# Altium PCB pcb2.PcbDoc
Units mil, origin at the board's own origin, x right, y up, seen from the top; angles counter-clockwise.
Board outline 4345 x 3590 mil, 2 copper layers (Top Layer, Bottom Layer); 19 components, 26 nets, 108 pads, 0 vias.
Unrouted connection lines stored in the file: 3.
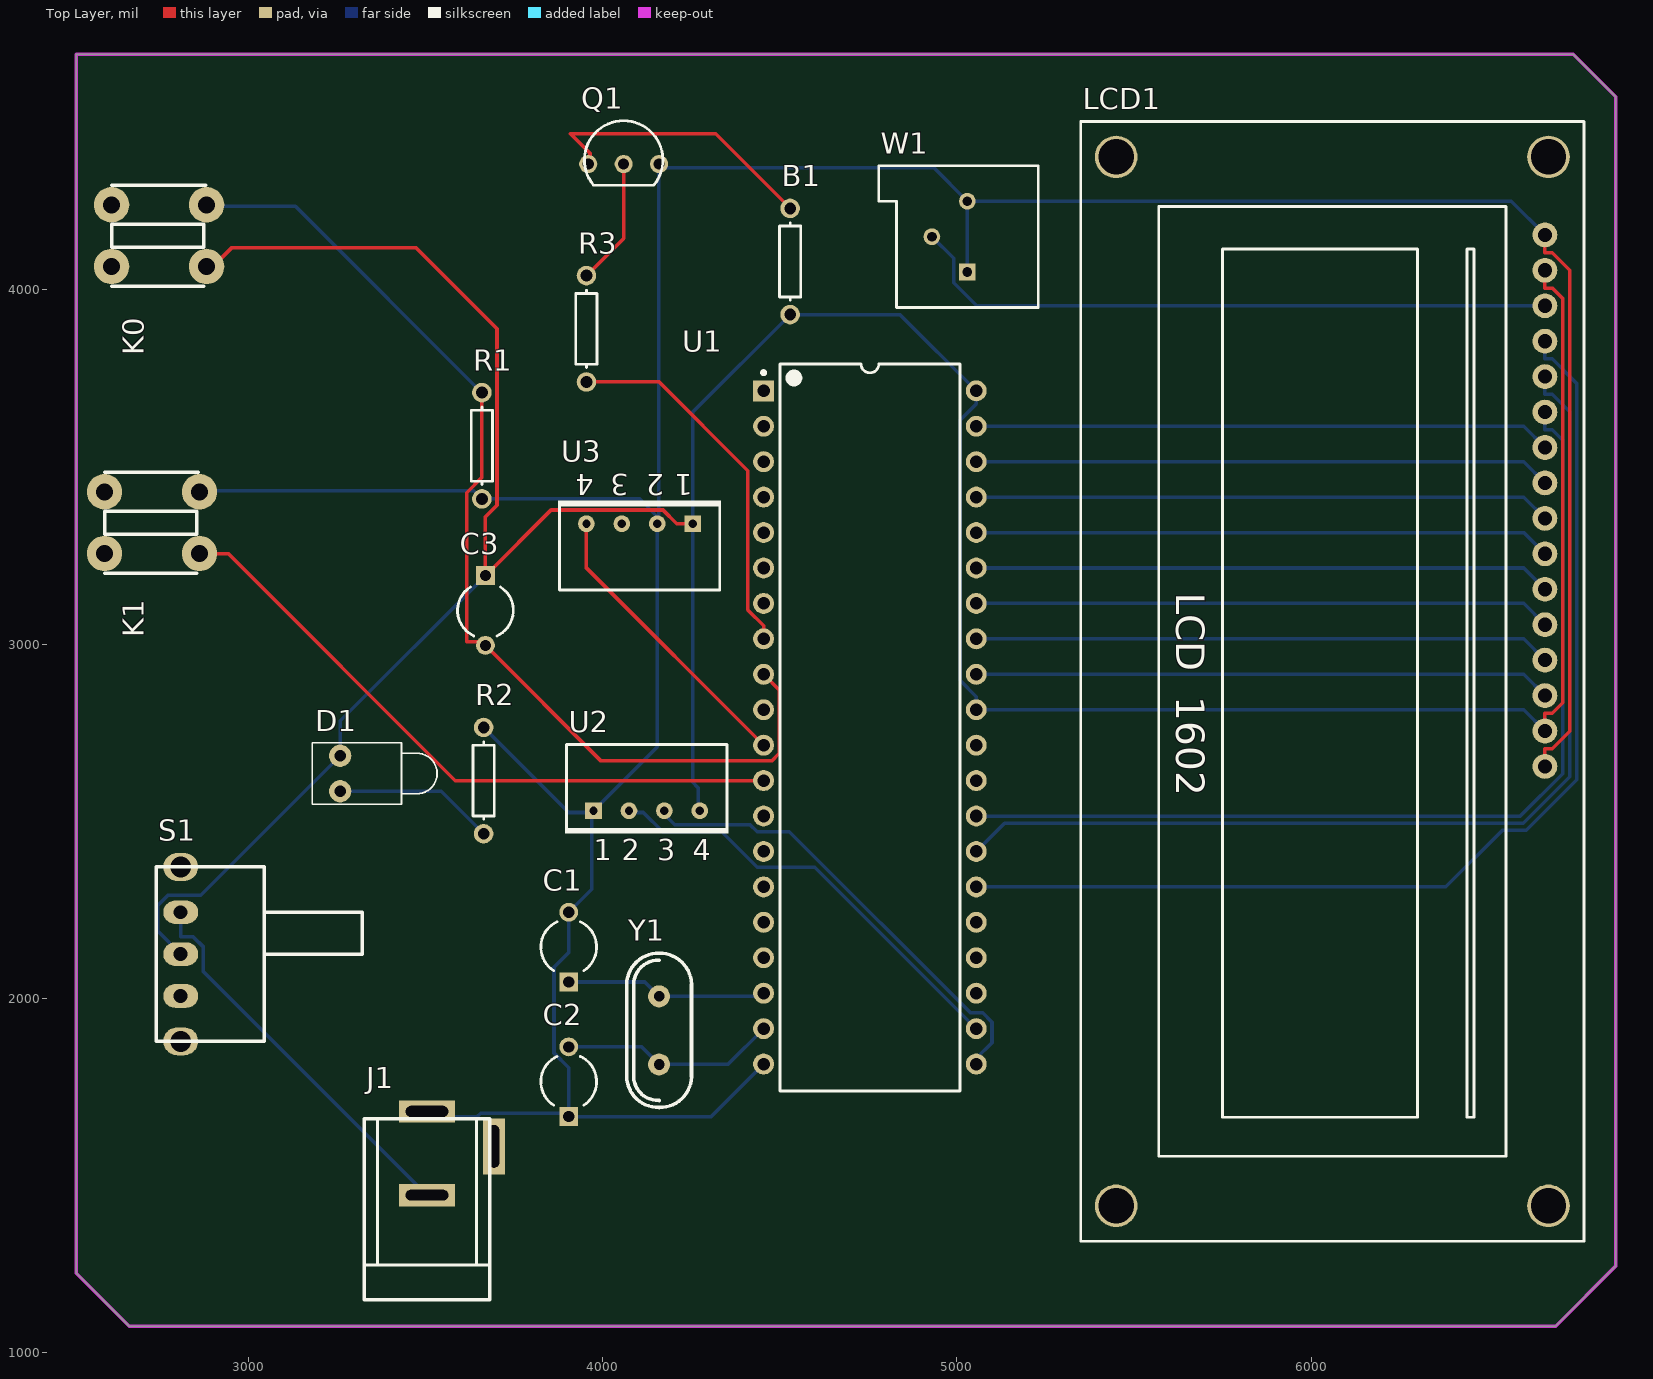
[diagram p0: Top Layer view]
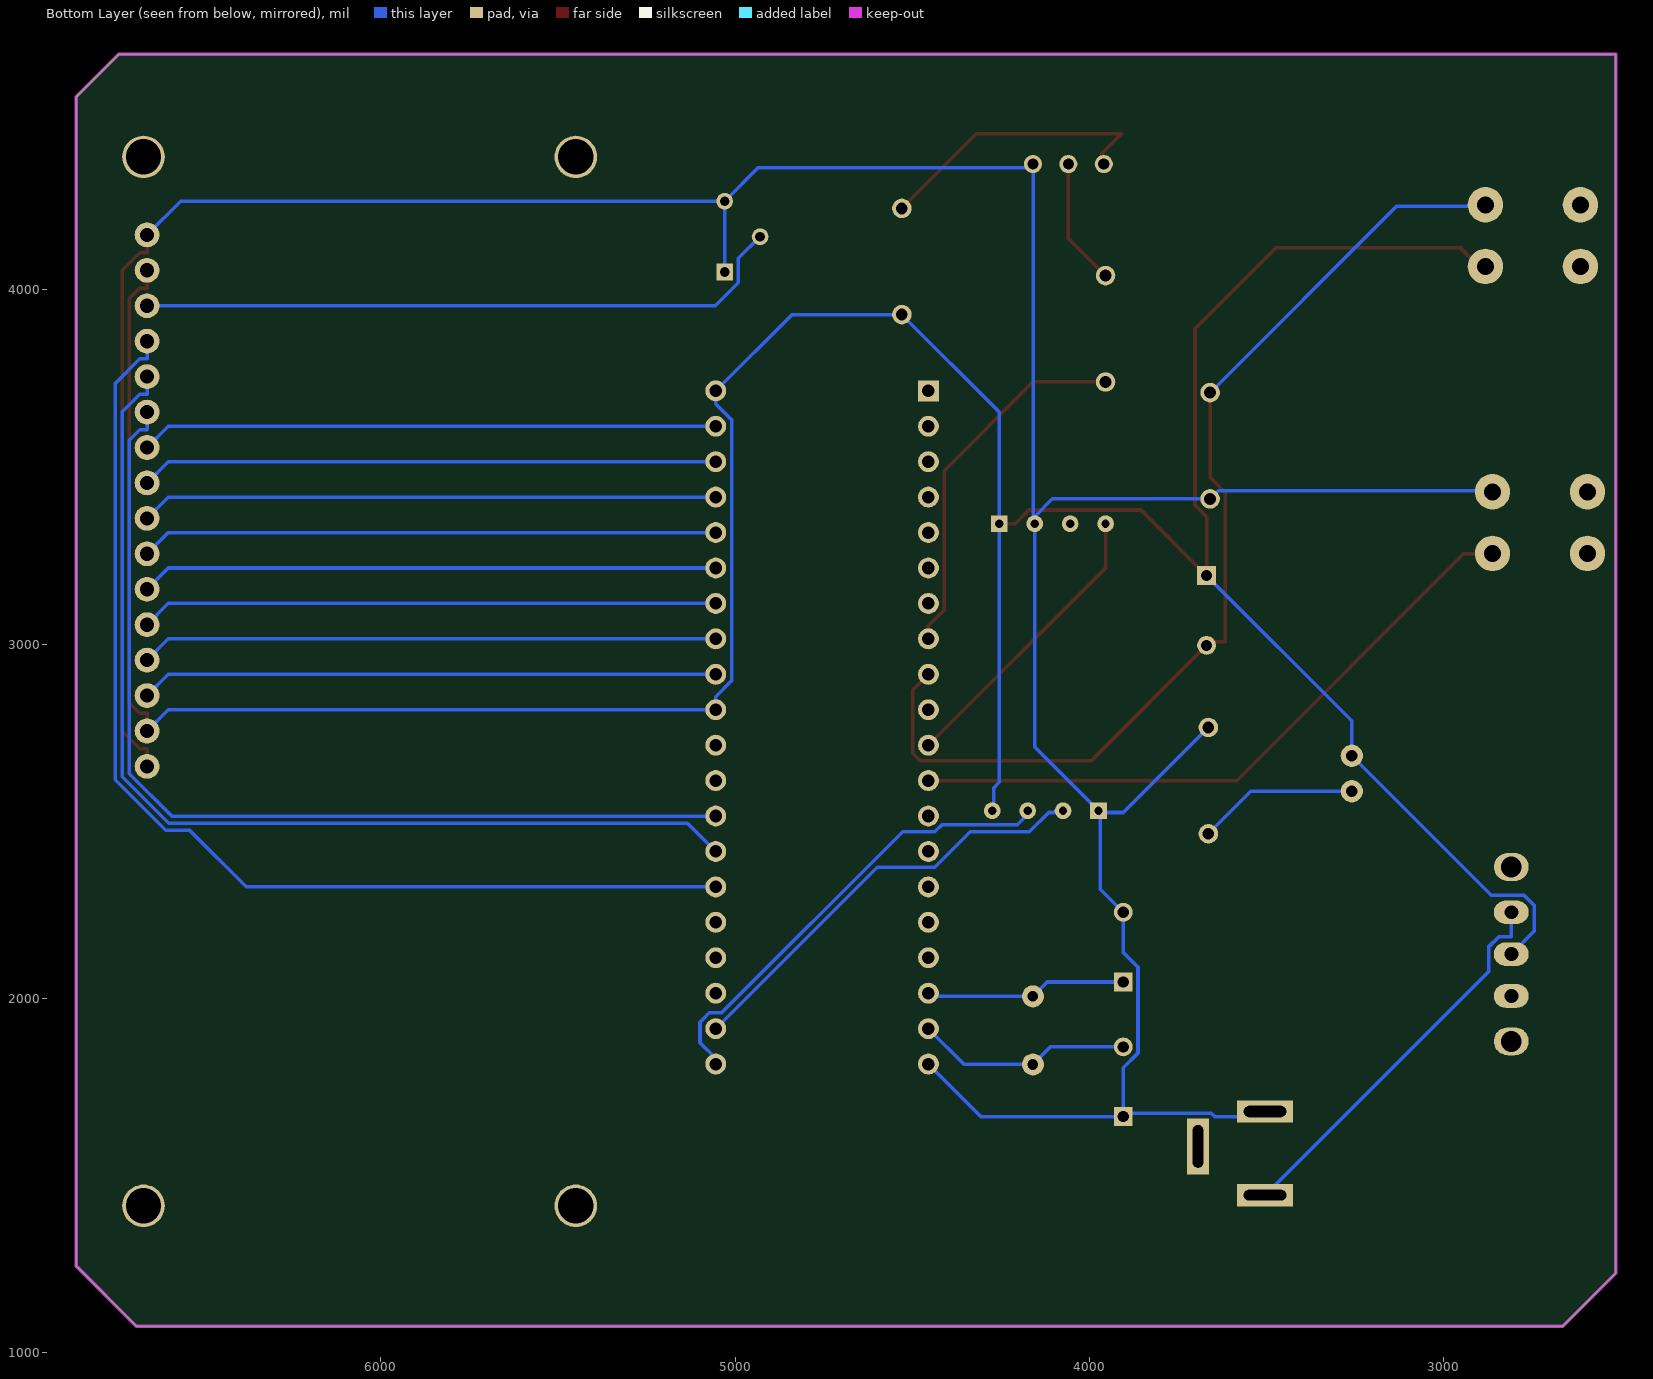
[diagram p1: Bottom Layer view, seen from below]

## Layer stack, top to bottom
Top Layer: signal copper 1.4
Dielectric: dielectric 12.6, FR-4, Dk 4.8
Bottom Layer: signal copper 1.4

## Board outline
2515,1225 2665,1075 6690,1075 6860,1245 6860,4545 6740,4665 2515,4665
cut-out: 2375,3275

## Design rules (kind name [scope] priority, off if disabled: settings)
Clearance [All] p1: gap=10
PolygonConnect [All] p1: connectstyle=Relief reliefconductorwidth=10 reliefentries=4 polygonreliefangle="90 Angle"
RoutingVias [All] p1: holewidth=28 width=50 viastyle="Through Hole" minholewidth=28 minwidth=50 maxholewidth=28 maxwidth=50
SilkscreenOverComponentPads SilkToSolderMaskClearance [IsPad] p1: minsilkscreentomaskgap=10
SolderMaskExpansion [All] p1: expansion=4
TestPointUsage FabricationTestPointUsage [All] p1: valid=0 allowmultiple=FALSE
Testpoint FabricationTestpoint [All] p1: side=3 testpointundercomponent=TRUE minsize=40 maxsize=100 preferedsize=60 minholesize=0 maxholesize=40 preferedholesize=32 testpointgrid=1 style=297 order=0123456789
Width [All] p1: maxlimit=10 minlimit=10 preferedwidth=10
23 further rules are at their usual default settings.

## Components (designator, comment, footprint, x,y, rotation, side; value= is the part's Value field where it differs from the comment)
B1 "" AXIAL-0.3 4530,4080 r270 top
C1 "22PF" CAPR5-4X5 3905,2145 r90 top
C2 "22PF" CAPR5-4X5 3905,1765 r90 top
C3 "10uF" CAPR5-4X5 3670,3095 r270 top
D1 "LED" LED-1 3260,2635 r0 top
J1 "CON2" DCIN 3505,1681.22 r270 top
K0 "SW DIP-2" PCBComponent_1 2615,4240 r0 top (schematic designator S3)
K1 "SW DIP-2" PCBComponent_1 2595,3430 r0 top (schematic designator S3)
LCD1 "LCD1602" "LCD 1602" 6060,2895 r270 top
Q1 "PNP" TO-92C-S 4060,4355 r0 top
R1 "10k" AXIAL-0.3 3660,3560 r270 top
R2 "1K" AXIAL-0.3 3665,2615 r90 top
R3 "1k" AXIAL-0.3 3955,3890 r90 top
S1 "SW-SPST" "SW-1 X 2" 2810,2125.32 r0 top
U1 "CPU" DIP-40 4755,2765 r0 top
U2 "HX711AD" SIP-P4/A6 4125,2530 r0 top
U3 "BT" SIP-P4/A6 4105,3340 r180 top
W1 "10K" VR4 4980,4150 r90 top
Y1 "CRYSTAL" XTAL2 4160,1910 r270 top

## Footprints (in the part's own frame and the unit in brackets; to place one, negate y for a bottom-side part, rotate by r counter-clockwise, add the part's x,y. Pads: shape width x height; smd on the part's side, far side on the other; paste and mask are expansions set on the pad)
AXIAL-0.3 [mm] "Axial Device, Thru-Hole; 2 Leads; 0.3 in Pin Spacing"
  round 1.4 hole 0.85: 1(-3.81,0) 2(3.81,0)
  silkscreen extent -2.77,-0.76 2.77,0.76
CAPR5-4X5 [mm] "Capacitor; 2 Leads"
  rect 1.35x1.35 hole 0.8: 1(-2.5,0)
  round 1.35 hole 0.8: 2(2.5,0)
  silkscreen extent -1.69,-2 1.82,2
DCIN [mm]
  rect 1.6x4 hole 0.8 slot 3.048 at 90 deg: 1(0,0)
  rect 1.6x4 hole 0.762 slot 3.048 at 90 deg: 2(6,0)
  rect 4x1.6 hole 0.762 slot 3.048 at 0 deg: 3(2.5,4.8)
  silkscreen extent 0.52,-4.5 13.5,4.5, body extent -0.2,-4.5 13.62,5, height 11.2
DIP-40 [mm] "DIP, 40-Pin, Row Spacing 15.24 mm, Pitch 2.54 mm"
  rect 1.5x1.5 hole 0.9: 1(-7.62,24.13)
  round 1.5 hole 0.9: 2(-7.62,21.59) 3(-7.62,19.05) 4(-7.62,16.51) 5(-7.62,13.97) 6(-7.62,11.43) 7(-7.62,8.89) 8(-7.62,6.35) 9(-7.62,3.81) 10(-7.62,1.27) 11(-7.62,-1.27) 12(-7.62,-3.81) 13(-7.62,-6.35) 14(-7.62,-8.89) 15(-7.62,-11.43) 16(-7.62,-13.97) 17(-7.62,-16.51) 18(-7.62,-19.05) 19(-7.62,-21.59) 20(-7.62,-24.13) 21(7.62,-24.13) 22(7.62,-21.59) 23(7.62,-19.05) 24(7.62,-16.51) 25(7.62,-13.97) 26(7.62,-11.43) 27(7.62,-8.89) 28(7.62,-6.35) 29(7.62,-3.81) 30(7.62,-1.27) 31(7.62,1.27) 32(7.62,3.81) 33(7.62,6.35) 34(7.62,8.89) 35(7.62,11.43) 36(7.62,13.97) 37(7.62,16.51) 38(7.62,19.05) 39(7.62,21.59) 40(7.62,24.13)
  silkscreen extent -7.74,-26.05 6.45,26.05, body extent -7.42,-26.03 7.42,26.03, height 5.08
"LCD 1602" [mil]
  round 120 hole 100: 0(-1480,-610) 0(-1480,610) 0(1480,-610) 0(1480,610)
  round 70 hole 40: 1(-1260,600) 2(-1160,600) 3(-1060,600) 4(-960,600) 5(-860,600) 6(-760,600) 7(-660,600) 8(-560,600) 9(-460,600) 10(-360,600) 11(-260,600) 12(-160,600) 13(-60,600) 14(40,600) 15(140,600) 16(240,600)
  silkscreen extent -1580,-710 1580,710
LED-1 [mm] "LED; 2 Leads"
  round 1.6 hole 0.8: 1(0,1.27) 2(0,-1.27)
  silkscreen extent -2,-2.2 6.95,2.2
PCBComponent_1 [mil]
  round 100 hole 48: 1(0,0) 2(0,-174) 3(268,-174) 4(268,0)
  silkscreen extent 0,-230 265,55
SIP-P4/A6 [mm] "SIP; 4 Leads; Body 10 x 11.5 x 6 mm (typ); Pitch 2.54 mm"
  rect 1.2x1.2 hole 0.6: 1(-3.81,0)
  round 1.2 hole 0.6: 2(-1.27,0) 3(1.27,0) 4(3.81,0)
  silkscreen extent -5.85,-1.65 5.86,4.75
"SW-1 X 2" [mm]
  oval 2.5x1.7 hole 1: 1(0,3) 2(0,0) 3(0,-3)
  oval 2.5x2 hole 1.5: 5(0,-6.25) 6(0,6.25)
  silkscreen extent -1.75,-6.25 13,6.25, body extent -0.61,-6.52 12.29,6.48, height 5.75
TO-92C-S [mm]
  round 1.3 hole 0.8: 1(2.54,0) 2(0,0) 3(-2.54,0)
  silkscreen extent -2.81,-1.52 2.81,3.1, body extent -2.89,-1.53 2.85,2.66, height 10.33
VR4 [mm] "Thru-Hole; 3 Leads"
  rect 1.2x1.2 hole 0.7: 1(-2.54,-1.27)
  round 1.2 hole 0.7: 2(0,1.27) 3(2.54,-1.27)
  silkscreen extent -5.08,-6.35 5.08,5.08
XTAL2 [mil]
  round 62 hole 30: 1(96.06,0) 2(-96.06,0)
  silkscreen extent -218,-92 218,92, body extent -223,-92 223,92, height 142

## Part data
B1: library part BELL, "Bell"
C1 C2: library part CAP, "Capacitor"
C3: library part "Cap Pol1", "Polarized Capacitor (Radial)"
J1: "Connector"
K0 K1: "DIP Switch"
Q1: "PNP Transistor"
R1 R2 R3: library part RES2
U1: library part 8031
U3: library part HC-06
W1: library part POT2, "Potentiometer"
Y1: "Crystal"

## Nets (pads, with @x,y where several pads share a name; then routed paths per layer and width w, separated by ;. In a path a pad name is that pad's centre, name@x,y a point inside that pad or via, vN(x,y) a via of type N, cw(c..) or ccw(c..) an arc to the next point about the centre after c; other vN are vias at no path point)
GND: C1.2 C2.1 J1.1 LCD1.1 LCD1.16 Q1.3 R1.2 R2.2 U1.20 U3.2 W1.1 W1.3 | length 10178.3
  Top Layer w10: LCD1.16 6660,2705 6680.71,2705 6730,2754.29 6730,4055.71 6680.71,4105 6660,4105 LCD1.1
  Bottom Layer w10: 2885,3433.11 3636.89,3433.11 R1.2 4105,3410 U3.2@4155,3360 ; J1.1 3519.65,1666.57 3646.31,1666.57 3656.27,1676.53 ; R2.2 3905,2525 3970,2525 ; 4159.41,4361.81 4159.41,3352.6 4167.6,3352.6 U3.2 4155,2710 3970,2525 ; 4164.41,4345 4935,4345 W1.3 ; U1.20 4306.57,1666.57 C2.1 C2.1@3905,1676.53 ; W1.1 W1.3 ; LCD1.1 6565,4250 W1.3 ; 3656.27,1676.53 C2.1@3905,1676.53 ; 3656.27,1676.53 C2.1@3905,1676.53 ; C2.1@3905,1676.53 3905,1804.63 3863.43,1846.21 3863.43,2088.15 3905,2129.72 C1.2 3970,2308.43 3970,2525
NetB1_1: B1.1 Q1.2 | length 814.8
  Top Layer w10: 3965,4355 3965,4385 3910,4440 4320,4440 B1.1
NetC1_1: C1.1 U1.18 Y1.2 | length 570.5
  Bottom Layer w10: C1.1 4119.49,2046.57 Y1.2 4446.06,2006.06 U1.18
NetC2_2: C2.2 U1.19 Y1.1 | length 612.4
  Bottom Layer w10: C2.2 4110.51,1863.43 Y1.1 4353.94,1813.94 U1.19
NetC3_2: C3.2 R1.1 U1.9 | length 2975.7
  Top Layer w10: R1.1 3660,3470.19 3617.44,3427.63 3617.44,3006.57 3660,3006.57 C3.2 3996.1,2670.47 4477.97,2670.47 4499.53,2692.03 4499.53,2870.47 U1.9
  Bottom Layer w10: 2895,4236.22 3133.78,4236.22 R1.1
NetD1_2: D1.2 R2.1 | length 454.7
  Bottom Layer w10: D1.2 3545,2585 R2.1
NetJ1_2: J1.2 S1.1 | length 1107.3
  Bottom Layer w10: S1.1 2810,2173.78 2845.82,2173.78 2874.21,2145.39 2874.21,2075.79 J1.2
NetK1_2: U1.12 | length 1830.1
  Top Layer w10: 2890,3255 2945,3255 3585,2615 U1.12
NetLCD1_3: LCD1.3 W1.2 | length 1850.9
  Bottom Layer w10: W1.2 4991.38,4088.62 4991.38,4020.16 5056.54,3955 LCD1.3
NetLCD1_4: LCD1.4 U1.26 | length 3107.1
  Bottom Layer w10: U1.26 6380,2315 6540,2475 6607.28,2475 6750,2617.72 6750,3735.71 6680.71,3805 6660,3805 LCD1.4
NetLCD1_5: LCD1.5 U1.27 | length 2932.5
  Bottom Layer w10: U1.27 5135,2495 6598.99,2495 6730,2626.01 6730,3655.71 6680.71,3705 6660,3705 LCD1.5
NetLCD1_6: LCD1.6 U1.28 | length 2758
  Bottom Layer w10: U1.28 6590.71,2515 6710,2634.29 6710,3575.71 6680.71,3605 6660,3605 LCD1.6
NetLCD1_7: LCD1.7 U1.39 | length 1629.9
  Bottom Layer w10: U1.39 6600,3615 LCD1.7
NetLCD1_8: LCD1.8 U1.38 | length 1629.9
  Bottom Layer w10: U1.38 6600,3515 LCD1.8
NetLCD1_9: LCD1.9 U1.37 | length 1629.9
  Bottom Layer w10: U1.37 6600,3415 LCD1.9
NetLCD1_10: LCD1.10 U1.36 | length 1629.9
  Bottom Layer w10: U1.36 6600,3315 LCD1.10
NetLCD1_11: LCD1.11 U1.35 | length 1629.9
  Bottom Layer w10: U1.35 6600,3215 LCD1.11
NetLCD1_12: LCD1.12 U1.34 | length 1629.9
  Bottom Layer w10: U1.34 6600,3115 LCD1.12
NetLCD1_13: LCD1.13 U1.33 | length 1629.9
  Bottom Layer w10: U1.33 6600,3015 LCD1.13
NetLCD1_14: LCD1.14 U1.32 | length 1629.9
  Bottom Layer w10: U1.32 6600,2915 LCD1.14
NetQ1_1: Q1.1 R3.2 | length 358.5
  Top Layer w10: R3.2 4060,4145 4060,4355
NetR3_1: R3.1 U1.8 | length 1052.2
  Top Layer w10: R3.1 4160,3740 4410.47,3489.53 4410.47,3096.56 4455,3052.03 U1.8
NetU1_11: U1.11 U3.4 | length 832.1
  Top Layer w10: U3.4 3955,3215 U1.11
NetU1_21: U1.21 | length 1311.4
  Bottom Layer w10: 4170,2525 4204.53,2490.47 4416.56,2490.47 4436.56,2470.47 4527.81,2470.47 5038.76,1959.53 5073.44,1959.53 5099.53,1933.44 5099.53,1875.47 5055,1830.94 U1.21
NetU1_22: U1.22 | length 1237.7
  Bottom Layer w10: 4070,2525 4115.38,2525 4169.91,2470.47 4336.56,2470.47 4436.56,2370.47 4599.53,2370.47 U1.22
VCC: B1.2 C3.1 D1.1 LCD1.2 LCD1.15 S1.2 U1.31 U1.40 U3.1 | length 9917.3
  Top Layer w10: 2895,4060 2953.11,4118.11 3474.45,4118.11 3702.56,3890 3702.56,3392.37 3670,3359.81 C3.1 3855.2,3378.62 4171,3378.62 4209.62,3340 U3.1 ; LCD1.15 6660,2805 6680.71,2805 6710,2834.29 6710,3975.71 6680.71,4005 6660,4005 LCD1.2
  Bottom Layer w10: S1.2 2745.79,2189.53 2745.79,2263.5 2774.18,2291.89 2866.89,2291.89 D1.1 3260,2783.43 C3.1 ; 4270,2525 4270,2595 4255,2610 U3.1 4255,3655 B1.2 4840,3930 U1.40 5055,3677.97 5010.47,3633.44 5010.47,2896.56 5055,2852.03 U1.31 6600,2815 LCD1.15
pads on no net: J1.3 K0.1 K0.2 K0.3 K0.4 K1.1 K1.2 K1.3 K1.4 LCD1.0 S1.3 S1.5 S1.6 U1.1 U1.2 U1.3 U1.4 U1.5 U1.6 U1.7 U1.10 U1.13 U1.14 U1.15 U1.16 U1.17 U1.23 U1.24 U1.25 U1.29 U1.30 U2.1 U2.2 U2.3 U2.4 U3.3

## Keep-outs
Keep-Out Layer:
  the board outline again, w10

## Text inside footprints (layer, text, board x,y; h text height)
LCD1: Top Overlay "LCD  1602" at 5620,3145 h80 r270
U2: Top Overlay "4" at 4255,2390.47 h59.06; Top Overlay "3" at 4155,2390.47 h59.06; Top Overlay "2" at 4055,2390.47 h59.06; Top Overlay "1" at 3975,2390.47 h59.06
U3: Top Overlay "1" at 4255,3479.53 h59.06 r180; Top Overlay "2" at 4175,3479.53 h59.06 r180; Top Overlay "3" at 4075,3479.53 h59.06 r180; Top Overlay "4" at 3975,3479.53 h59.06 r180